# Altium PCB power-routing.PcbDoc
Units mm, origin at the board's own origin, x right, y up, seen from the top; angles counter-clockwise.
Board outline 152.4 x 101.6 mm, 2 copper layers (Top Layer, Bottom Layer); 29 components, 0 nets, 78 pads, 33 vias.
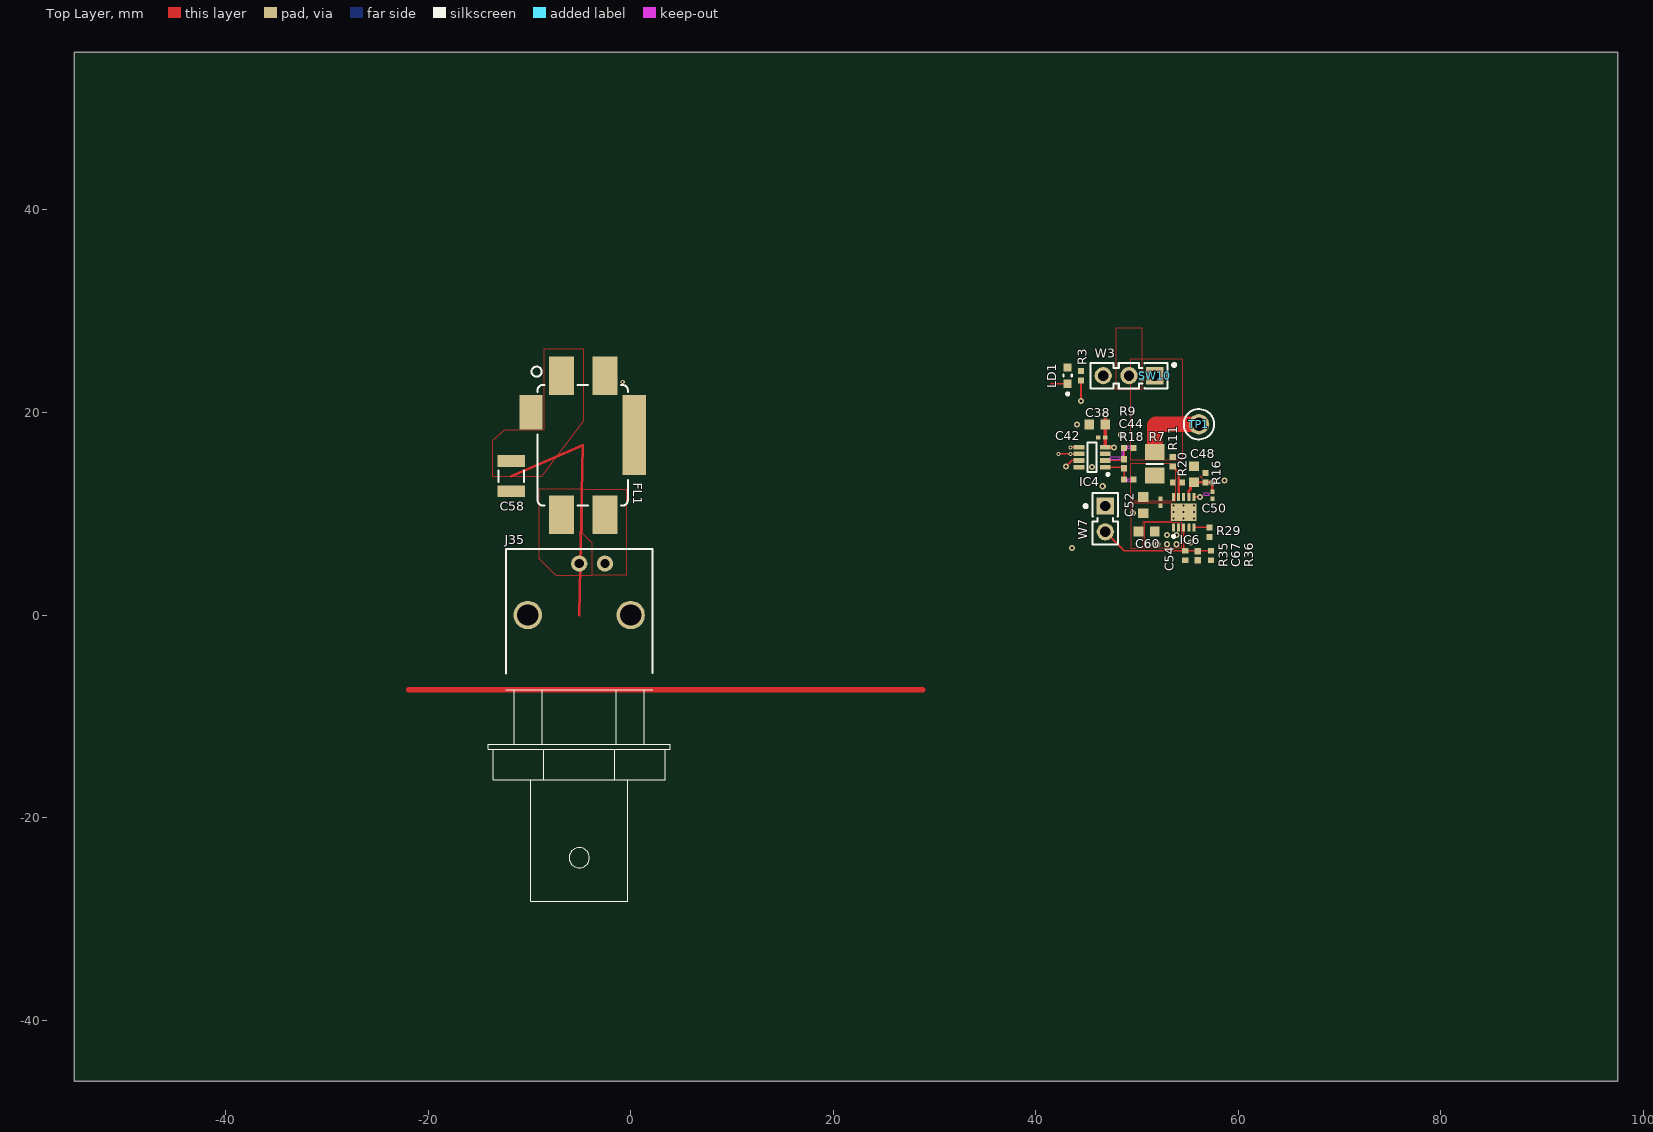
[diagram p0: Top Layer view]
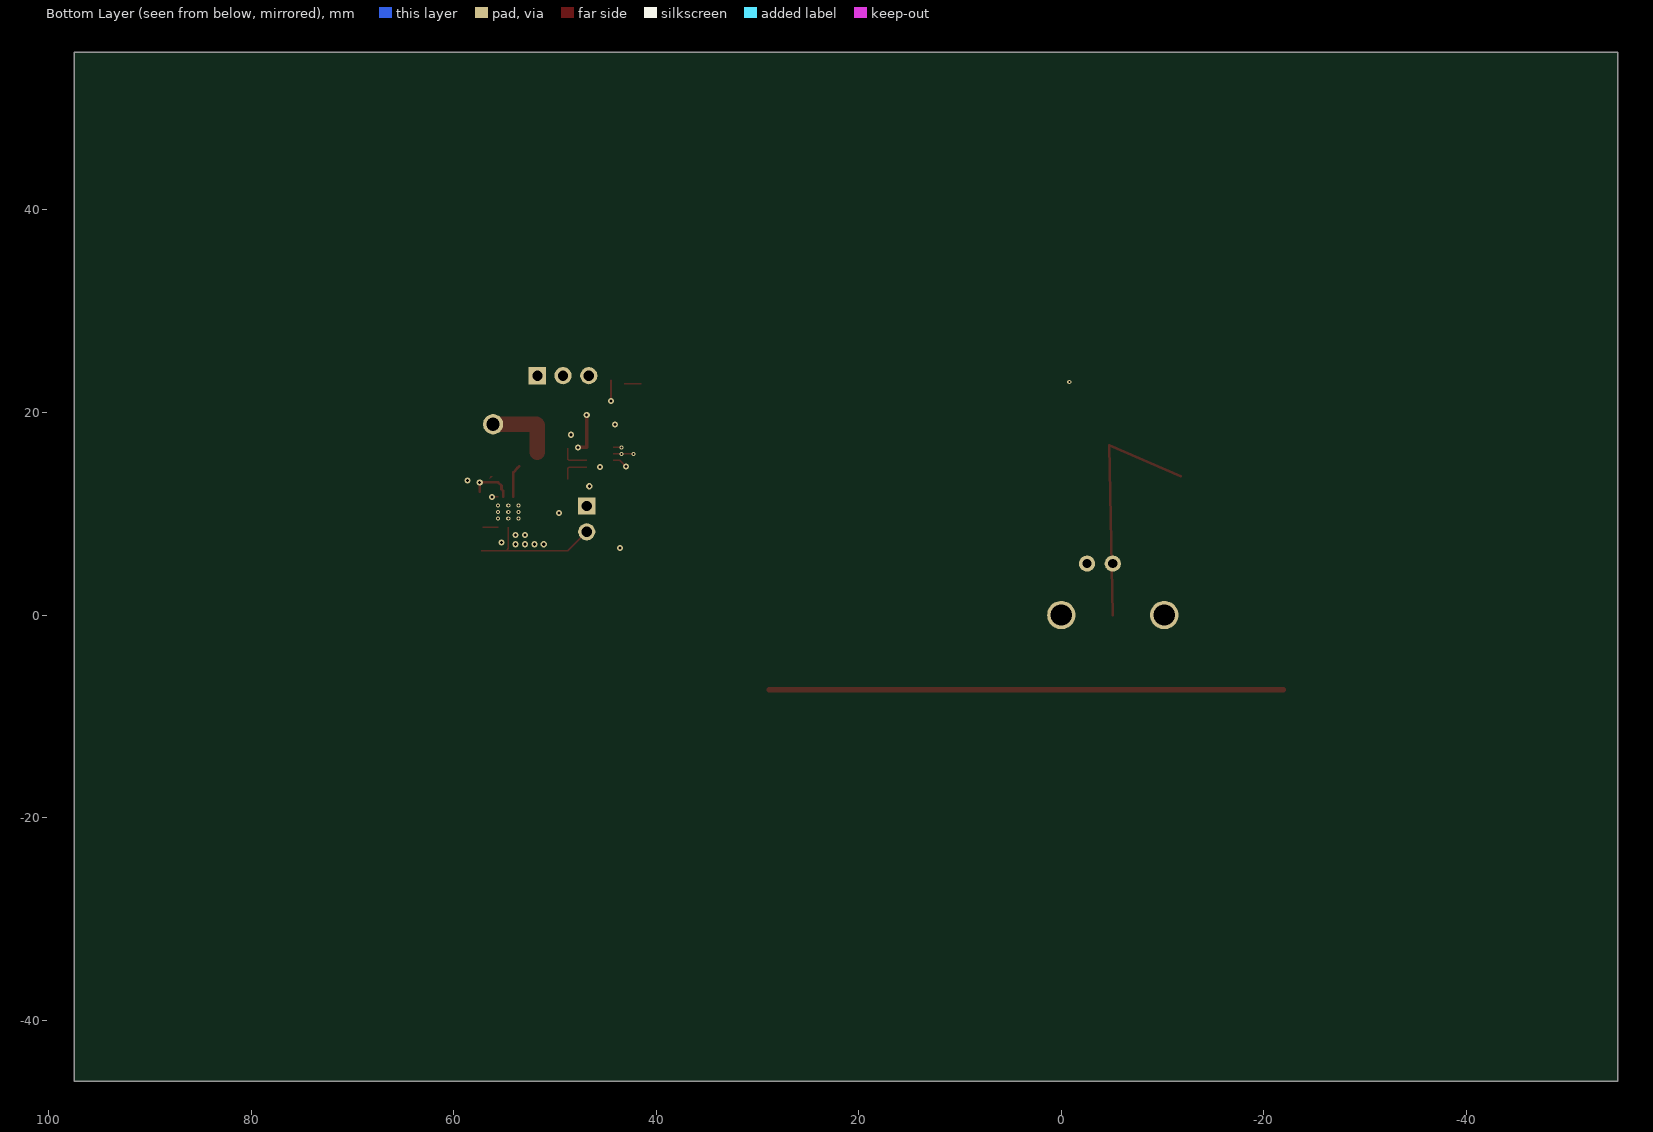
[diagram p1: Bottom Layer view, seen from below]

## Layer stack, top to bottom
Top Solder: solder mask 0.0102, Solder Resist, Dk 3.5
Top Layer: signal copper 0.0356
Dielectric 1: dielectric 0.32, FR-4, Dk 4.8
Bottom Layer: signal copper 0.0356
Bottom Solder: solder mask 0.0102, Solder Resist, Dk 3.5

## Board outline
-54.938,-46.032 97.462,-46.032 97.462,55.568 -54.938,55.568

## Design rules (kind name [scope] priority, off if disabled: settings)
Clearance [All] p1: gap=0.254 ignorepadtopadclearanceinfootprint=FALSE
PolygonConnect [All] p1: connectstyle=Relief reliefconductorwidth=0.254 reliefentries=4 polygonreliefangle="90 Angle" airgapwidth=0.254
RoutingVias [All] p1: holewidth=0.711 width=1.27 viastyle="Through Hole" minholewidth=0.711 minwidth=1.27 maxholewidth=0.711 maxwidth=1.27
SolderMaskExpansion [All] p1: expansion=0.102 istentingtop=FALSE
Width [All] p1: maxlimit=0.254 minlimit=0.254 preferedwidth=0.254
30 further rules are at their usual default settings.

## Components (designator, comment, footprint, x,y, rotation, side; value= is the part's Value field where it differs from the comment)
C38 "10uF" CAPC1608X87N 46.063,18.807 r0 top locked
C42 "220nF" CAPC0603X33N 46.513,17.537 r0 top locked
C44 "1uF" CAPC1005X55N 48.717,14.937 r90 top locked
C48 "10uF" CAPC1608X87N 55.61,13.899 r270 top locked
C50 "220nF" CAPC0603X33N 57.429,11.826 r90 top locked
C52 "10uF" CAPC1608X87N 50.615,10.86 r90 top locked
C54 "220nF" CAPC0603X33N 52.32,11.148 r90 top locked
C58 "100uF" CAPC3225X270N -11.778,13.712 r90 top
C60 "10uF" CAPC1608X87N 50.94,8.26 r0 top locked
C67 "470nF" CAPC1005X55N 56,5.86 r270 top locked
FL1 "BNX029-01L" FIL_MURATA_BNX02 -4.734,16.768 r90 top
IC4 "INA236AIDDF" SOT65P280X110-8N 45.563,15.587 r180 top locked
IC6 "LT3045EDD" SON50P300X300X80-11N-R175X248 54.61,10.16 r90 top locked
J35 "BNC" AMPHENOL_B6252H7-NPP3G-50 -5.08,0 r0 top
LD1 "Red" LED_OSRAM_LGL29K 43.152,23.635 r90 top locked
R3 "5R1" RESC1005X40N 44.475,23.635 r270 top locked
R7 "0R08" RESC3216X89N 51.74,14.937 r90 top locked
R9 "100" RESC1005X40N 49.187,16.485 r0 top locked
R11 "0" RESC1005X40N 53.52,15.151 r270 top locked
R16 "12k" RESC1005X40N 56.769,13.568 r270 top locked
R18 "100" RESC1005X40N 49.187,13.389 r0 top locked
R20 "0" RESC1005X40N 53.99,13.098 r0 top locked
R29 "300" RESC1005X40N 57.15,8.19 r90 top locked
R35 "1k" RESC1005X40N 54.76,5.88 r90 top locked
R36 "100k" RESC1005X40N 57.3,5.88 r90 top locked
SW10 "Jumper Type1" STELVIO-KONTEK_3131730000402 51.74,23.635 r180 top locked
TP1 "" VERO_20-2136 56.11,18.842 r90 top locked
W3 "Header 3" SAMTEC_HTSW-103-23-L-S 51.74,23.635 r180 top locked
W7 "Header 2" SAMTEC_HTSW-102-23-L-S 46.863,10.76 r270 top locked

## Footprints (in the part's own frame and the unit in brackets; to place one, negate y for a bottom-side part, rotate by r counter-clockwise, add the part's x,y. Pads: shape width x height; smd on the part's side, far side on the other; paste and mask are expansions set on the pad)
AMPHENOL_B6252H7-NPP3G-50 [mm] "RF / Coaxial Connector, BNC Coaxial, Right Angle Jack, Through Hole Right Angle, 50 ohm"
  round 1.6 hole 0.9: 1(0,5.08) 2(2.54,5.08)
  round 2.8 hole 2.1: MECH(-5.08,0) MECH(5.08,0)
  silkscreen extent -9,-28.27 9,6.53, body extent -9,-28.27 9,6.53, height 15.9
CAPC0603X33N [mm] "Chip Capacitor, Body 0.6x0.30mm, IPC Medium Density"
  rect 0.45x0.4 smd: 1(-0.35,0) 2(0.35,0)
  body extent -0.31,-0.16 0.32,0.17, height 0.33
CAPC1005X55N [mm] "Capacitor, Non-Polarized, Chip; 1.00mm L X 0.50mm W X 0.70mm H, IPC Medium Density"
  rect 0.62x0.62 smd: 1(-0.45,0) 2(0.45,0)
  body extent -0.52,-0.27 0.53,0.28, height 0.55
CAPC1608X87N [mm] "Chip Capacitor, Body 1.6x0.8mm IPC Medium Density"
  rect 0.95x1 smd: 1(-0.8,0) 2(0.8,0)
  body extent -0.87,-0.47 0.88,0.48, height 0.87
CAPC3225X270N [mm] "Chip Capacitor, Body 3.2x2.5mm, IPC Medium Density"
  rect 1.15x2.7 smd: 1(-1.5,0) 2(1.5,0)
  silkscreen extent -0.55,-1.25 0.55,1.25, body extent -1.7,-1.35 1.7,1.35, height 2.7
FIL_MURATA_BNX02 [mm] "Block Type EMIFIL LC Combined Type, BNX02* Series"
  rect 3.8x2.5 smd: 1(-6.85,2.1) 2(6.85,2.1) 3(-6.85,-2.2) 4(6.85,-2.2)
  rect 7.9x2.3 smd: 4(1,-5.1)
  rect 3.4x2.3 smd: 4(3.25,5.1)
  silkscreen extent -5.95,-4.45 7.77,5.05, body extent -6.05,-4.55 6.05,4.55, height 3.1
LED_OSRAM_LGL29K [mm] "Green Chip LED, 2-Leads, Body 1.7x0.8mm, IPC Medium Density"
  rect 0.8x0.8 smd: 1(-0.8,0) 2(0.8,0)
  silkscreen extent -1.92,-0.4 0.1,0.4, body extent -0.85,-0.4 0.85,0.4, height 0.67
RESC1005X40N [mm] "Chip Resistor, EIA 0402, Metric 1005, Body 1.0x0.5mm, IPC Medium Density"
  rect 0.58x0.62 smd: 1(-0.47,0) 2(0.47,0)
  body extent -0.52,-0.27 0.53,0.28, height 0.4
RESC3216X89N [mm] "Chip Resistor, EIA 1206, Metric 3216, Body 3.2x1.6mm, IPC Medium Density"
  rect 1.6x1.9 smd: 1(-1.15,0) 2(1.15,0)
  silkscreen extent 0,-0.8 0,0.8, body extent -1.72,-0.92 1.73,0.93, height 0.89
SAMTEC_HTSW-102-23-L-S [mm] "2 Contacts - Pitch 2.54mm - Single Row  Through Mount Straigh Header (Post Lead 5.84mm, Tail Lead 2.92mm, Insulator 2.54mm)"
  rect 1.7x1.7 hole 1: 1(0,0)
  round 1.7 hole 1: 2(2.54,0)
  silkscreen extent -1.27,-2.09 3.81,1.27, body extent -1.27,-1.27 3.81,1.27, height 8.38
SAMTEC_HTSW-103-23-L-S [mm] "3 Contacts - Pitch 2.54mm - Single Row  Through Mount Straigh Header (Post Lead 5.84mm, Tail Lead 2.92mm, Insulator 2.54mm)"
  rect 1.7x1.7 hole 1: 1(0,0)
  round 1.7 hole 1: 2(2.54,0) 3(5.08,0)
  silkscreen extent -2.08,-1.27 6.35,1.27, body extent -1.27,-1.27 6.35,1.27, height 8.38
SON50P300X300X80-11N-R175X248 [mm] "SON, 0.50mm Pitch; 10-pin, 3.00mm W  X 3.00mm L X 0.80mm H Body, (w/thermal tab 1.75 X 2.48 mm), IPC Medium Density"
  rect 0.8x0.3 smd: 1(-1.5,1) 2(-1.5,0.5) 3(-1.5,0) 4(-1.5,-0.5) 5(-1.5,-1) 6(1.5,-1) 7(1.5,-0.5) 8(1.5,0) 9(1.5,0.5) 10(1.5,1)
  rect 1.75x2.48 smd: 11(0,0)
  silkscreen extent -2.52,0.87 -2.28,1.12, body extent -1.5,-1.5 1.5,1.5, height 0.8
SOT65P280X110-8N [mm] "DO-403D /SMA Molded Diode, Body 5.59x2.92mm"
  rect 1.05x0.45 smd: 1(-1.3,0.975) 2(-1.3,0.325) 3(-1.3,-0.325) 4(-1.3,-0.975) 5(1.3,-0.975) 6(1.3,-0.325) 7(1.3,0.325) 8(1.3,0.975)
  silkscreen extent -1.68,-1.45 0.45,1.82, body extent -1.4,-1.5 1.4,1.5, height 1
STELVIO-KONTEK_3131730000402 [mm] "Red Insulated Jumper Pitch 2.54mm W=2.5mm L=5mm H=6.5mm"
  round 0.9 smd paste-0.46 mask-0.46: 1(0,0)
  silkscreen extent 1.1,-0.38 1.44,0.38, body extent -1.23,-1.25 3.77,1.25, height 9.04
VERO_20-2136 [mm] "Black Bead PCB Terminal Test Pin (1.32 mm hole)"
  round 2 hole 1.3: 1(0,0)
  silkscreen extent -1.5,-1.5 1.5,1.5, body extent -1.5,-1.5 1.5,1.5, height 5.4

## Part data
C38 C48 C52 C60: library part CC0603_10UF_6.3V_20%_X5R, "Non-polarised capacitor", Case=0603, Manufacturer=GENERIC, Manufacturer1 ComponentHeight=0.95mm, Manufacturer1 Example=KEMET, Manufacturer1 Part Number=C0603C106M9PAC, Manufacturer Part Number=CC0603_10uF_6.3V_20%_X5R, Tolerance=±20%, Voltage=6.3V, Author="CERN DEM JLC", Component Type=Standard, CreateDate=03/12/2007, HelpURL=\\cern.ch\dfs\Applications\Altium\Datasheets\CC0603_X5R_KEMET.pdf, LatestRevisionDate=03/12/2007, Mounted=Yes, Part Description="SMD Multilayer Chip Ceramic Capacitor", Part Number=CC0603_10UF_6.3V_20%_X5R, Pin Count=2, Sense=No, SMD=Yes, Socket=No, Status=Preferred, TC=X5R
C42 C50 C54: library part CC0201_220NF_6.3V_10%_X7S_TDK_C0603X7S0J224K030, "Non-polarised capacitor", Case=0201, Manufacturer=TDK, Manufacturer Part Number=C0603X7S0J224K030, Tolerance=±10%, Voltage=6.3V, Author="CERN DEM BC", Component Type=Standard, ComponentHeight=0.33mm, CreateDate=11/25/2020, HelpURL=\\cern.ch\dfs\Applications\Altium\Datasheets\CC0201_X7S_TDK_C.pdf, LatestRevisionDate=11/25/2020, Mounted=Yes, Part Description="SMD Multilayer Chip Ceramic Capacitor", Part Number=CC0201_220NF_6.3V_10%_X7S_TDK_C0603X7S0J224K030, Pin Count=2, Sense=No, SMD=Yes, Socket=No, Status="Not Recommended", TC=X7S
C44: library part CC0402_1UF_16V_10%_X5R, "Non-polarised capacitor", Case=0402, Manufacturer=GENERIC, Manufacturer1 ComponentHeight=0.55mm, Manufacturer1 Example=TDK, Manufacturer1 Part Number=C1005X5R1C105KT, Tolerance=±10%, Voltage=16V, Author="CERN DEM JLC", Component Type=Standard, CreateDate=10/25/2012, HelpURL=\\cern.ch\dfs\Applications\Altium\Datasheets\CC0402_X5R_TDK_C.pdf, LatestRevisionDate=10/25/2012, Manufacturer Part Number=CC0402_1UF_16V_10%_X5R, Mounted=Yes, Part Description="SMD Multilayer Chip Ceramic Capacitor", Part Number=CC0402_1UF_16V_10%_X5R, Pin Count=2, Sense=No, SMD=Yes, Socket=No, Status=Preferred, TC=X5R
C58: library part CC1210_100UF_6.3V_20%_X7U, "Non-polarised capacitor", Case=1210, Manufacturer=GENERIC, Manufacturer1 ComponentHeight=2.7mm, Manufacturer1 Example=MURATA, Manufacturer1 Part Number=GRM32EE70J107ME15L, Tolerance=±20%, Voltage=6.3V, Author="CERN DEM MR", Component Type=Standard, CreateDate=12/10/2017, HelpURL=\\cern.ch\dfs\Applications\Altium\Datasheets\CC1210_X7U_MURATA.pdf, LatestRevisionDate=12/10/2017, Manufacturer Part Number=CC1210_100UF_6.3V_20%_X7U, Mounted=Yes, Part Description="SMD Multilayer Chip Ceramic Capacitor", Part Number=CC1210_100UF_6.3V_20%_X7U, Pin Count=2, Sense=No, SMD=Yes, Socket=No, Status=None, TC=X7U
C67: library part CC0402_470NF_6.3V_10%_X5R, "Non-polarised capacitor", Case=0402, Manufacturer=GENERIC, Manufacturer1 ComponentHeight=0.55mm, Manufacturer1 Example=MURATA, Manufacturer1 Part Number=GRM155R60J474KE19D, Tolerance=±10%, Voltage=6.3V, Author="CERN DEM JLC", Component Type=Standard, CreateDate=22/04/2010, HelpURL=\\cern.ch\dfs\Applications\Altium\Datasheets\CC0402_X5R_MURATA_GRM.pdf, LatestRevisionDate=22/04/2010, Manufacturer Part Number=CC0402_470NF_6.3V_10%_X5R, Mounted=Yes, Part Description="SMD Multilayer Chip Ceramic Capacitor", Part Number=CC0402_470NF_6.3V_10%_X5R, Pin Count=2, Sense=No, SMD=Yes, Socket=No, Status=Preferred, TC=X5R
FL1: library part FIL_MURATA_BNX022-01L, "Block Type EMIFIL (LC Combined)", Manufacturer=MURATA, Manufacturer Part Number=BNX022-01L, Resistance=0.5R, Author="CERN DEM JLC", Component Type=Standard, ComponentHeight=3.3mm, CreateDate=10/10/2012, HelpURL=\\cern.ch\dfs\Applications\Altium\Datasheets\FIL_MURATA_BNX022-01L.pdf, LatestRevisionDate=10/10/2012, Mounted=Yes, Part Description="Block Type EMIFIL (LC Combined) SMD Type, BNX02* Series", Part Number=FIL_MURATA_BNX022-01L, Pin Count=2, Sense=No, SMD=Yes, Socket=No
IC4: "48-V, 16-Bit, Ultra-Precise, Current, Voltage, and Power Monitor with an I2C Interface", Case=SOT23-8, Manufacturer="TEXAS INSTRUMENTS", Author="CERN DEM HF", Bonding=No, Component Type=Standard, ComponentHeight=1.1mm, CreateDate=05/05/2023, Device=INA236AIDDF, HelpURL=\\cern.ch\dfs\Applications\Altium\Datasheets\INA236.pdf, LatestRevisionDate=05/05/2023, Manufacturer Part Number=INA236AIDDF, Mounted=Yes, PackageDescription="SOT, 0.65mm pitch; 8 Pin, 1.625mm W X 2.90mm L X 1.10mm H body, IPC Medium Density", Part Description="48-V, 16-Bit, Ultra-Precise, Current, Voltage, and Power Monitor with an I2C Interface", Part Number=INA236AIDDF, Pin Count=8, PressFit=No, Sense=No, SMD=Yes, Socket=No
IC6: library part LT3045EDD#PBF, "20V, 500mA, Ultralow Noise, Ultrahigh PSRR Linear Regulator", Case=SON10, Manufacturer="LINEAR TECHNOLOGY", Author="CERN DEM JLC", Bonding=No, Component Type=Standard, ComponentHeight=0.8mm, CreateDate=07/12/2016, Device=LT3045EDD, HelpURL=\\cern.ch\dfs\Applications\Altium\Datasheets\LT3045EDD#PBF.pdf, LatestRevisionDate=03/02/2022, Manufacturer Part Number=LT3045EDD, Mounted=Yes, PackageDescription="SON, 0.50mm Pitch; 10 Pin, 3.00mm W X 3.00mm L X 0.80mm H body (w/Thermal Tab 1.75 X 2.48 mm), IPC Medium Density", Part Description="20V, 500mA, Ultralow Noise, Ultrahigh PSRR Linear Regulator", Part Number=LT3045EDD#PBF, Pin Count=11, PressFit=No, Sense=No, SMD=Yes, Socket=No
J35: library part AMPHENOL_B6252H7-NPP3G-50, Manufacturer=AMPHENOL-RF, Manufacturer Part Number=B6252H7-NPP3G-50, Author="CERN DEM HF", Component Type=Standard, ComponentHeight=13.4mm, CreateDate=13/02/2023, Family=BNC, HelpURL=\\cern.ch\dfs\Applications\Altium\Datasheets\AMPHENOL-RF_B6252H7-NPP3G-50.pdf, LatestRevisionDate=13/02/2023, Mounted=Yes, Part Description="RF / Coaxial Connector, BNC Coaxial, Right Angle Jack, Through Hole Right Angle, 50 ohm", Part Number=AMPHENOL_B6252H7-NPP3G-50, Pin Count=4, PressFit=No, Sense=No, SMD=No, Socket=No, Status=None
LD1: library part "LED_OSRAM_LG L29K-G2J1-24-Z", "LED Green 1C 2A", Case=0603, Manufacturer=OSRAM, Manufacturer Part Number="LG L29K-G2J1-24-Z", Author="CERN DEM JLC", Bonding=No, Color=Red, Component Type=Standard, ComponentHeight=0.67mm, CreateDate=24/04/2012, HelpURL=\\cern.ch\dfs\Applications\Altium\Datasheets\LED_OSRAM_LGL29K.pdf, LatestRevisionDate=24/04/2012, Mounted=Yes, PackageDescription="Green Chip LED, 2-Leads, Body 1.7x0.8mm, IPC Medium Density", Part Description="Surface Mount Green LED (0603 Case)", Part Number="LED_OSRAM_LG L29K-G2J1-24-Z", Pin Count=2, PressFit=No, Sense=No, SMD=Yes, Socket=No, Status="Not Recommended", Status Comment="Sourcing Difficulty"
R3: library part R0402_5R1_1%_0.0625W_100PPM, "Resistor - 1%", Case=0402, Manufacturer=GENERIC, Manufacturer1 ComponentHeight=0.4mm, Manufacturer1 Example=VISHAY, Manufacturer1 Part Number=CRCW04025R10FK, Power=0.0625W, Tolerance=±1%, Author="CERN DEM MR", Component Type=Standard, CreateDate=22/11/2016, HelpURL="\\cern.ch\dfs\Applications\Altium\Datasheets\R0402_VISHAY_CRCW e3.pdf", LatestRevisionDate=22/11/2016, Manufacturer Part Number=R0402_5R1_1%_0.0625W_100PPM, Mounted=Yes, Part Description="General Purpose Thick Film Chip Resistor", Part Number=R0402_5R1_1%_0.0625W_100PPM, Pin Count=2, PressFit=No, Sense=No, SMD=Yes, Socket=No, Status="Not Recommended", TC=±100ppm/°C
R7: library part R1206_0R04_1%_0.5W_100PPM_VISHAY_WSL, "Resistor - 1%", Case=1206, Manufacturer="VISHAY DALE", Manufacturer Part Number=WSL1206R0400FEA, Power=0.5W, Tolerance=±1%, Author="CERN DEM JMW", Component Type=Standard, ComponentHeight=0.89mm, CreateDate=06/07/2015, HelpURL=\\cern.ch\dfs\Applications\Altium\Datasheets\R1206_VISHAY_WSL.pdf, LatestRevisionDate=06/07/2015, Mounted=Yes, Part Description="Power Metal Strip® Resistor", Part Number=R1206_0R04_1%_0.5W_100PPM_VISHAY_WSL, Pin Count=2, PressFit=No, Sense=No, SMD=Yes, Socket=No, Status=None, TC=±100ppm/°C
R9 R18: library part R0402_100R_1%_0.0625W_100PPM, "Resistor - 1%", Case=0402, Manufacturer=GENERIC, Manufacturer1 ComponentHeight=0.4mm, Manufacturer1 Example="YAGEO PHYCOMP", Manufacturer1 Part Number=232270671001L, Power=0.0625W, Tolerance=±1%, Author="CERN DEM JLC", Component Type=Standard, CreateDate=12/3/2007, HelpURL=\\cern.ch\dfs\Applications\Altium\Datasheets\R0402_Phycomp_RC0402.pdf, LatestRevisionDate=10/17/2012, Manufacturer Part Number=R0402_100R_1%_0.0625W_100PPM, Mounted=Yes, Part Description="General Purpose Thick Film Chip Resistor", Part Number=R0402_100R_1%_0.0625W_100PPM, Pin Count=2, PressFit=No, Sense=No, SMD=Yes, Socket=No, Status="Not Recommended", TC=±100ppm/°C
R11 R20: library part R0402_0R_JUMPER, "Resistor", Case=0402, Manufacturer=GENERIC, Manufacturer1 ComponentHeight=0.4mm, Manufacturer1 Example="YAGEO PHYCOMP", Manufacturer1 Part Number=232270591001L, Author="CERN DEM JLC", Component Type=Standard, CreateDate=03/12/2007, HelpURL=\\cern.ch\dfs\Applications\Altium\Datasheets\R0402_Phycomp_RC0402.pdf, LatestRevisionDate=17/10/2012, Manufacturer Part Number=R0402_0R_JUMPER, Part Description="1A (0.05R Max DC Resistance) Zero Ohm Jumper", Part Number=R0402_0R_JUMPER, Pin Count=2, PressFit=No, Sense=No, SMD=Yes, Socket=No, Status="Not Recommended"
  R11: Mounted=Yes
  R20: Mounted=No
R16: library part R0402_12K_1%_0.0625W_100PPM, "Resistor - 1%", Case=0402, Manufacturer=GENERIC, Manufacturer1 ComponentHeight=0.4mm, Manufacturer1 Example="YAGEO PHYCOMP", Manufacturer1 Part Number=232270671203L, Power=0.0625W, Tolerance=±1%, Author="CERN DEM JLC", Component Type=Standard, CreateDate=12/3/2007, HelpURL=\\cern.ch\dfs\Applications\Altium\Datasheets\R0402_Phycomp_RC0402.pdf, LatestRevisionDate=10/17/2012, Manufacturer Part Number=R0402_12K_1%_0.0625W_100PPM, Mounted=Yes, Part Description="General Purpose Thick Film Chip Resistor", Part Number=R0402_12K_1%_0.0625W_100PPM, Pin Count=2, PressFit=No, Sense=No, SMD=Yes, Socket=No, Status="Not Recommended", TC=±100ppm/°C
R29: library part R0402_300R_1%_0.0625W_100PPM, "Resistor - 1%", Case=0402, Manufacturer=GENERIC, Manufacturer1 ComponentHeight=0.4mm, Manufacturer1 Example="YAGEO PHYCOMP", Manufacturer1 Part Number=232270673001L, Power=0.0625W, Tolerance=±1%, Author="CERN DEM JLC", Component Type=Standard, CreateDate=03/12/2007, HelpURL=\\cern.ch\dfs\Applications\Altium\Datasheets\R0402_Phycomp_RC0402.pdf, LatestRevisionDate=17/10/2012, Manufacturer Part Number=R0402_300R_1%_0.0625W_100PPM, Mounted=Yes, Part Description="General Purpose Thick Film Chip Resistor", Part Number=R0402_300R_1%_0.0625W_100PPM, Pin Count=2, PressFit=No, Sense=No, SMD=Yes, Socket=No, Status="Not Recommended", TC=±100ppm/°C
R35: library part R0402_1K_1%_0.0625W_100PPM, "Resistor - 1%", Case=0402, Manufacturer=GENERIC, Manufacturer1 ComponentHeight=0.4mm, Manufacturer1 Example="YAGEO PHYCOMP", Manufacturer1 Part Number=232270671002L, Power=0.0625W, Tolerance=±1%, Author="CERN DEM JLC", Component Type=Standard, CreateDate=03/12/2007, HelpURL=\\cern.ch\dfs\Applications\Altium\Datasheets\R0402_Phycomp_RC0402.pdf, LatestRevisionDate=17/10/2012, Manufacturer Part Number=R0402_1K_1%_0.0625W_100PPM, Mounted=Yes, Part Description="General Purpose Thick Film Chip Resistor", Part Number=R0402_1K_1%_0.0625W_100PPM, Pin Count=2, PressFit=No, Sense=No, SMD=Yes, Socket=No, Status="Not Recommended", TC=±100ppm/°C
R36: library part R0402_100K_1%_0.0625W_100PPM, "Resistor - 1%", Case=0402, Manufacturer=GENERIC, Manufacturer1 ComponentHeight=0.4mm, Manufacturer1 Example="YAGEO PHYCOMP", Manufacturer1 Part Number=232270671004L, Power=0.0625W, Tolerance=±1%, Author="CERN DEM JLC", Component Type=Standard, CreateDate=03/12/2007, HelpURL=\\cern.ch\dfs\Applications\Altium\Datasheets\R0402_Phycomp_RC0402.pdf, LatestRevisionDate=17/10/2012, Manufacturer Part Number=R0402_100K_1%_0.0625W_100PPM, Mounted=Yes, Part Description="General Purpose Thick Film Chip Resistor", Part Number=R0402_100K_1%_0.0625W_100PPM, Pin Count=2, PressFit=No, Sense=No, SMD=Yes, Socket=No, Status="Not Recommended", TC=±100ppm/°C
SW10: library part STELVIO-KONTEK_3131730000402, "Jumper 1 Pin", Manufacturer=STELVIO-KONTEK, Manufacturer Part Number=3131730000402, Author="CERN DEM JLC", ClassName=Overlapping, Component Type=Standard, ComponentHeight=6.5mm, CreateDate=27/08/2013, Family=Jumper, HelpURL=\\cern.ch\dfs\Applications\Altium\Datasheets\STELVIO-KONTEK_3131730000402.pdf, LatestRevisionDate=27/08/2013, Mounted=Yes, Part Description="Closed Insulated Red Jumper Pitch 2.54mm", Part Number=STELVIO-KONTEK_3131730000402, Pin Count=1, PressFit=No, SCEM=09.55.10.950.1, Sense=No, SMD=No, Socket=No, Status=None
TP1: library part VERO_20-2136, "Test Point", Manufacturer="VERO TECHNOLOGIES", Manufacturer Part Number=20-2136, Author="CERN DEM JLC", Component Type=Standard, ComponentHeight=5.3mm, CreateDate=21/07/2008, Family="Test Point", HelpURL=\\cern.ch\dfs\Applications\Altium\Datasheets\VERO_20-2136.pdf, LatestRevisionDate=15/07/2013, Mounted=Yes, Part Description="Black Bead PCB Terminal Test Pin for 1.6mm PCB Thickness (1.32mm Hole)", Part Number=VERO_20-2136, Pin Count=1, PressFit=No, Sense=No, SMD=No, Socket=No, Status=None
W3: library part SAMTEC_HTSW-103-23-L-S, "3 Mini Wire-Wrap Contact Strip Header", Manufacturer=SAMTEC, Manufacturer Part Number=HTSW-103-23-L-S, Author="CERN DEM JLC", Component Type=Standard, ComponentHeight=8.38mm, CreateDate=22/02/2018, Family="Header 3", HelpURL=\\cern.ch\dfs\Applications\Altium\Datasheets\SAMTEC_HTSW-103-23-L-S.pdf, LatestRevisionDate=22/02/2018, Mounted=Yes, Part Description="3 Contacts, Pitch 2.54mm, Single Row  Through Mount Straight Header (Post Lead 5.84mm, Tail Lead 2.92mm, Insulator 2.54mm)", Part Number=SAMTEC_HTSW-103-23-L-S, Pin Count=3, PressFit=No, Sense=No, SMD=No, Socket=No, Status=Preferred, Status Comment="High Temperature"
W7: library part SAMTEC_HTSW-102-23-L-S, "2 Mini Wire-Wrap Contact Strip Header", Manufacturer=SAMTEC, Manufacturer Part Number=HTSW-102-23-L-S, Author="CERN DEM JLC", Component Type=Standard, ComponentHeight=8.38mm, CreateDate=22/02/2018, Family="Header 2", HelpURL=\\cern.ch\dfs\Applications\Altium\Datasheets\SAMTEC_HTSW-102-23-L-S.pdf, LatestRevisionDate=22/02/2018, Mounted=Yes, Part Description="2 Contacts, Pitch 2.54mm, Single Row  Through Mount Straight Header (Post Lead 5.84mm, Tail Lead 2.92mm, Insulator 2.54mm)", Part Number=SAMTEC_HTSW-102-23-L-S, Pin Count=2, PressFit=No, Sense=No, SMD=No, Socket=No, Status=Preferred, Status Comment="High Temperature"

## Via types
v1: diameter 0.6, hole 0.3, Top Layer to Bottom Layer, 20 vias
v2: diameter 0.4, hole 0.2, Top Layer to Bottom Layer, 13 vias

## Nets (pads, with @x,y where several pads share a name; then routed paths per layer and width w, separated by ;. In a path a pad name is that pad's centre, name@x,y a point inside that pad or via, vN(x,y) a via of type N, cw(c..) or ccw(c..) an arc to the next point about the centre after c; other vN are vias at no path point)
pads on no net: C38.1 C38.2 C42.1 C42.2 C44.1 C44.2 C48.1 C48.2 C50.1 C50.2 C52.1 C52.2 C54.1 C54.2 C58.1 C58.2 C60.1 C60.2 C67.1 C67.2 FL1.1 FL1.2 FL1.3 FL1.4 IC4.1 IC4.2 IC4.3 IC4.4 IC4.5 IC4.6 IC4.7 IC4.8 IC6.1 IC6.2 IC6.3 IC6.4 IC6.5 IC6.6 IC6.7 IC6.8 IC6.9 IC6.10 IC6.11 J35.1 J35.2 J35.MECH LD1.1 LD1.2 R3.1 R3.2 R7.1 R7.2 R9.1 R9.2 R11.1 R11.2 R16.1 R16.2 R18.1 R18.2 R20.1 R20.2 R29.1 R29.2 R35.1 R35.2 R36.1 R36.2 SW10.1 TP1.1 W3.1 W3.2 W3.3 W7.1 W7.2
copper on no net: | length 123.9
  Top Layer w0.127: 41.494,22.835 43.152,22.835 ; v2(42.237,15.912) v2(43.449,15.912) 44.263,15.912 ; v1(42.987,14.668) 43.581,15.262 44.263,15.262 ; v2(43.449,16.562) 44.263,16.562 ; 46.863,8.22 48.733,6.35 54.76,6.35 ; 46.863,14.612 48.592,14.612 48.717,14.487 48.717,13.389 ; 46.863,15.262 48.592,15.262 48.717,15.387 48.717,16.484 ; 54.61,8.66 54.61,6.576 54.76,6.35 ; 55.61,8.66 57.15,8.66 ; 55.61,11.66 v1(56.236,11.66) ; 57.3,6.35 54.76,6.35
  Top Layer w0.2: v1(44.475,21.144) 44.475,23.165
  Top Layer w0.254: -11.778,13.712 -4.734,16.768 -5.08,0 ; 53.52,14.681 53.54,14.681 53.703,14.518 53.703,14.498 54.11,14.091 54.11,11.66 ; 55.11,11.66 55.11,12.252 55.281,12.422 55.281,12.769 55.61,13.099 56.769,13.099 v1(57.429,13.099) 57.429,12.176
  Top Layer w0.381: v1(46.863,19.773) 46.863,18.807 46.863,17.537 46.863,16.562 v1(47.743,16.562)
  Top Layer w0.508: -21.918,-7.37 3.482,-7.37 28.882,-7.37
  Top Layer w1.524: 51.74,16.087 51.74,18.758 51.823,18.842 56.11,18.842
  other v1: 43.563,6.624 51.107,6.989 52.035,6.989 52.963,6.989 53.892,6.989 55.26,7.158 52.963,7.917 53.892,7.917 49.603,10.06 46.611,12.72 58.635,13.3 45.563,14.612 48.435,17.803 44.074,18.807
  other v2: 53.61,9.525 54.61,9.525 55.61,9.525 53.61,10.16 54.61,10.16 55.61,10.16 53.61,10.795 54.61,10.795 55.61,10.795 -0.784,23.018

## Polygon pours and split planes (outlines as drawn)
no net on Top Layer "VDDIO_LDO" (solid, remove dead copper, pour order 7): 49.367,15.287 49.367,25.319 54.46,25.319 54.46,15.287
no net on Top Layer "VDDIO_HEADER" (solid, remove dead copper, pour order 6): 47.93,28.367 50.47,28.367 50.47,22.271 47.93,22.271
no net on Top Layer "VDDIO_LDO_OUT" (solid, remove dead copper, pour order 5): 49.367,14.971 53.76,14.971 53.76,11.26 49.367,11.26
no net on Top Layer "P1V8_VDDIO_LDO" (solid, remove dead copper, pour order 4): 50.742,9.169 54.348,9.169 54.348,6.576 50.742,6.576
no net on Top Layer "VDDIO_LDO_THERMAL" (solid, remove dead copper, pour order 3): 53.37,11.035 49.367,11.035 49.367,6.576 50.615,6.576 50.615,9.285 53.37,9.285
no net on Top Layer "PMAIN_FILTER" (solid, remove dead copper, pour order 2): -8.572,26.258 -8.572,18.223 -12.5,18.223 -13.654,17.199 -13.654,13.685 -8.793,13.685 -4.637,19.21 -4.637,26.258
no net on Top Layer "INPUT_POWER_N" (solid, remove dead copper, pour order 1): -3.81,7.094 -4.734,8.018 -4.734,12.405 -0.446,12.405 -0.446,3.906 -3.81,3.906
no net on Top Layer "INPUT_POWER_P" (solid, remove dead copper, pour order 0): -4.734,12.405 -9.082,12.405 -9.082,5.588 -7.4,3.906 -3.81,3.906 -3.81,7.094 -4.734,8.018

## Keep-outs
Top Layer:
  rectangle: 56.61,11.808 57.145,12.008
  rectangle: 49.026,16.451 49.349,16.651
  region: 49.349,13.423 49.025,13.423 49.025,13.223 49.349,13.223
  rectangle: 47.35,15.397 48.361,15.597
  region: 48.677,15.778 48.677,16.102 48.477,16.102 48.477,15.778

## Other copper
Top Layer:
  region: 56.506,13.49 56.386,13.49 56.201,13.675 56.216,13.69 56.346,13.69